# EAGLE board servo_1 (EAGLE 6.5.0)
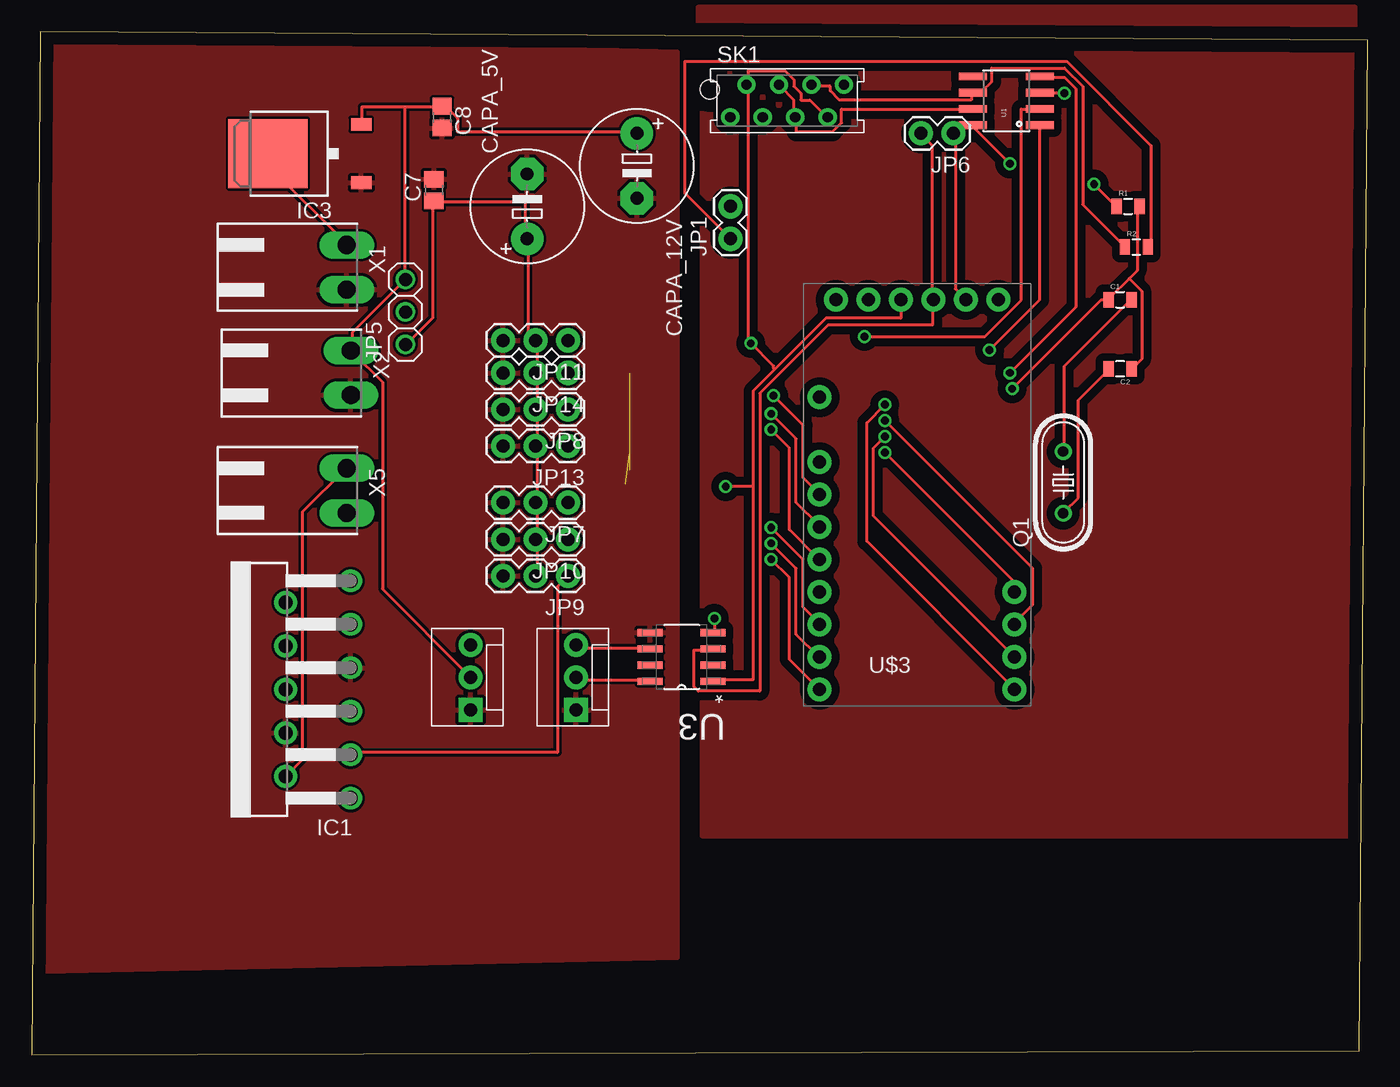
[diagram p0: board, top side]
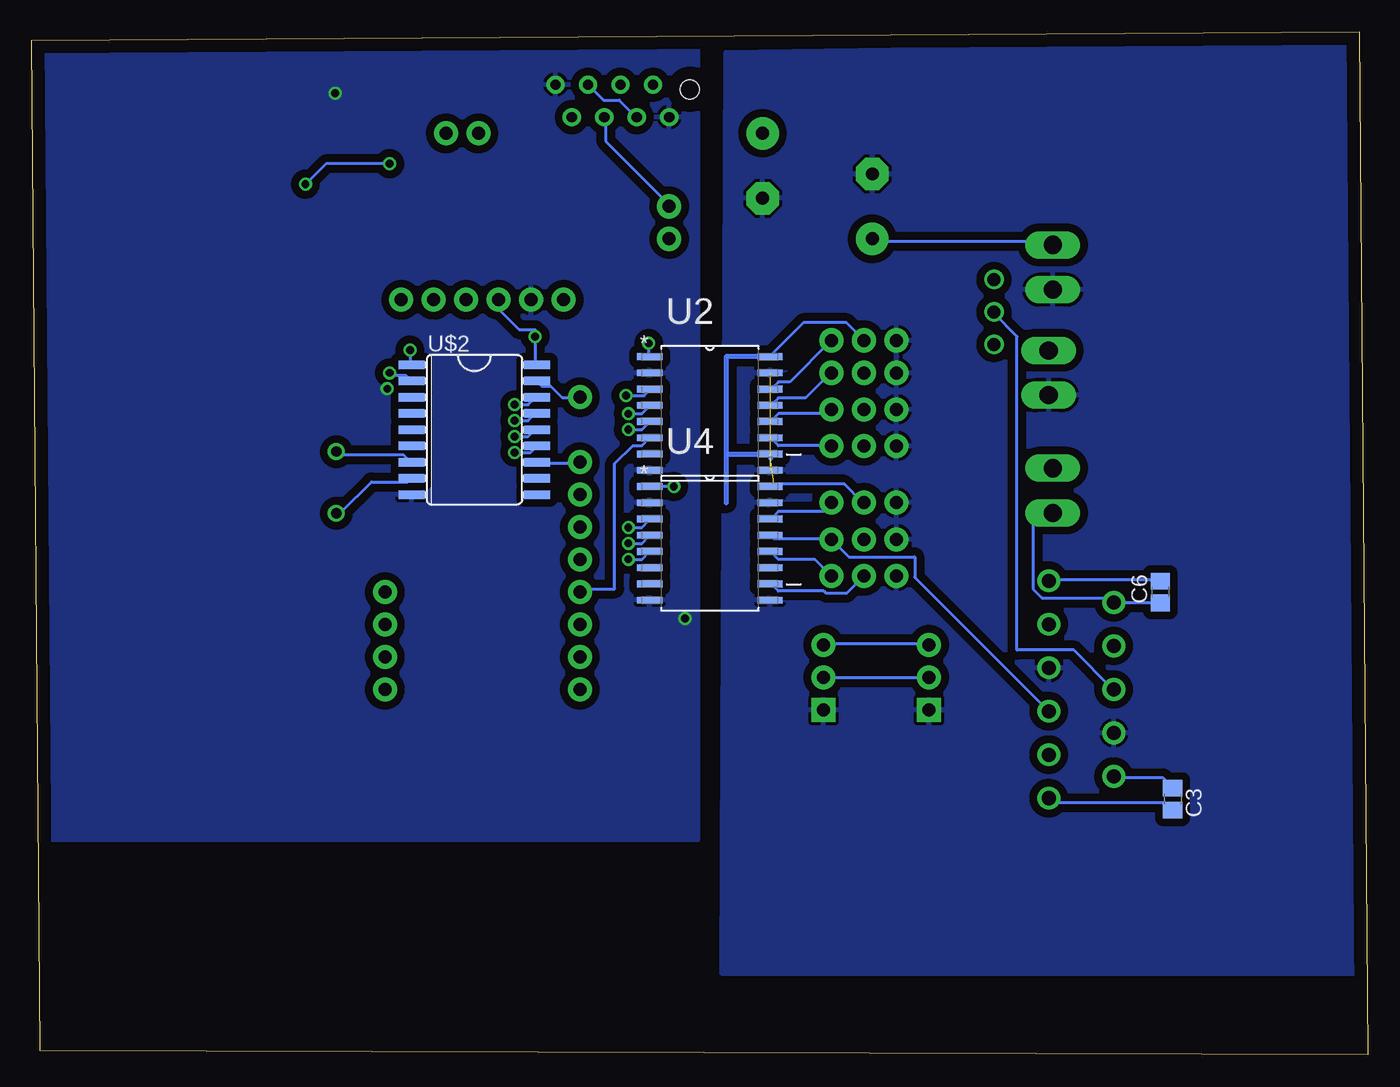
[diagram p1: board, bottom side, seen from below]

Size 104.44 x 80 mm. Coordinates in mm from the lower left corner, seen from the top.
Outline: 0,0 103.81,0.32 104.44,79.36 0.63,80 0,0
Copper layers (1*16): Top 0.035mm / dielectric 1.5mm / Bottom 0.035mm
Design rules "default": minimum track width 10mil, minimum drill 24mil, track to track 8mil, track to pad 8mil, pad to pad 8mil, via to via 8mil, smd to smd 8mil, copper to edge 40mil, drill to drill 8mil, minimum pad ring 10mil, minimum via ring 8mil, stop-mask expansion 4mil, vias tented up to drill 0mil, thermal gap 10mil
Net classes: 0 default: clearance 0.205 mm

## Footprints (pad centres in the part's own frame; a part is rotated, then mirrored left to right if it is on the bottom)
0805 = smd 0.8 x 1.2: 1 -0.9,0; 2 0.9,0
C0805 = smd 1.3 x 1.5: 1 -0.85,0; 2 0.85,0
E5-8,5 = drill 1.016 pad 2.54: + -2.54,0 | drill 1.016 pad 2.54 octagon: - 2.54,0
TO-220-11 = drill 1.1 pad 1.778: 1 -8.5,-9.37; 2 -6.8,-4.29; 3 -5.1,-9.37; 4 -3.4,-4.29; 5 -1.7,-9.37; 6 0,-4.29; 7 1.7,-9.37; 8 3.4,-4.29; 9 5.1,-9.37; 10 6.8,-4.29; 11 8.5,-9.37
DPACK = smd 1 x 1.6: 1 -2.28,-4.8; 3 2.28,-4.8 | smd 5.4 x 6.2: 2 0,2.5
1X02 = drill 1.016 pad 1.88: 1 0,0; 2 2.54,0
MOLEX-1X3 = drill 1.016 pad 1.88 square: 1 0,0 | drill 1.016 pad 1.88: 2 2.54,0; 3 5.08,0
1X03 = drill 1.016: 1 -2.54,0; 2 0,0; 3 2.54,0
1X03' = drill 1.016 pad 1.88: 1 0,0; 2 2.54,0; 3 5.08,0
HC49/S = drill 0.813: 1 -2.413,0; 2 2.413,0
AMP-215079-8 = drill 0.8 pad 1.422: 1 0,-1.27; 2 1.27,1.27; 3 2.54,-1.27; 4 3.81,1.27; 5 5.08,-1.27; 6 6.35,1.27; 7 7.62,-1.27; 8 8.89,1.27 | hole 1.5: -1.62,0.905
SO08 = smd 0.61 x 2.21: 1 -1.905,-2.616; 2 -0.635,-2.616; 3 0.635,-2.616; 4 1.905,-2.616; 5 1.905,2.616; 6 0.635,2.616; 7 -0.635,2.616; 8 -1.905,2.616
SOIC127P1032X265-16N = smd 1.981 x 0.533: 1 -4.699,4.445; 2 -4.699,3.175; 3 -4.699,1.905; 4 -4.699,0.635; 5 -4.699,-0.635; 6 -4.699,-1.905; 7 -4.699,-3.175; 8 -4.699,-4.445; 9 4.699,-4.445; 10 4.699,-3.175; 11 4.699,-1.905; 12 4.699,-0.635; 13 4.699,0.635; 14 4.699,1.905; 15 4.699,3.175; 16 4.699,4.445
SOIC127P600X175-8N = smd 1.981 x 0.559: 1 -2.464,1.905; 2 -2.464,0.635; 3 -2.464,-0.635; 4 -2.464,-1.905; 5 2.464,-1.905; 6 2.464,-0.635; 7 2.464,0.635; 8 2.464,1.905
SO18L = smd 0.66 x 2.032: 1 -5.08,-4.902; 2 -3.81,-4.902; 3 -2.54,-4.902; 4 -1.27,-4.902; 5 0,-4.902; 6 1.27,-4.902; 7 2.54,-4.902; 8 3.81,-4.902; 9 5.08,-4.902; 10 5.08,4.902; 11 3.81,4.902; 12 2.54,4.902; 13 1.27,4.902; 14 0,4.902; 15 -1.27,4.902; 16 -2.54,4.902; 17 -3.81,4.902; 18 -5.08,4.902
ARDUINO_PRO_MINI = drill 1.016 pad 1.88: 3 -7.62,7.62; 5 -7.62,2.54; 6 -7.62,0; 7 -7.62,-2.54; 8 -7.62,-5.08; 9 -7.62,-7.62; 10 -7.62,-10.16; 11 -7.62,-12.7; 12 -7.62,-15.24; 13 7.62,-15.24; 14 7.62,-12.7; 15 7.62,-10.16; 16 7.62,-7.62; BLK -6.35,15.24; GND -3.81,15.24; GRN 6.35,15.24; RXI 1.27,15.24; TXO 3.81,15.24; VCC -1.27,15.24
90-2 = drill 1.422 long: 1 -1.75,5.25; 2 1.75,5.25

## Placement (x,y rotation side)
C1  22pF  [0805]  85.09,59.05 0 top
C2  22pF  [0805]  85.09,53.66 180 top
C3  100nF  [C0805]  15.24,20 270 bottom
C6  100nF  [C0805]  16.19,36.2 90 bottom
C7  100nF  [C0805]  31.43,67.63 90 top
C8  100nF  [C0805]  32.07,73.34 270 top
CAPA_5V  100uF  [E5-8,5]  38.73,66.36 90 top
CAPA_12V  100uF  [E5-8,5]  47.31,69.53 270 top
IC1  LM18200T  [TO-220-11]  15.56,28.57 90 top
IC3  MC33269D-3.3  [DPACK]  20.95,70.48 90 top
JP1  end_lign  [1X02]  54.61,63.82 90 top
JP2  AX-12_1  [MOLEX-1X3]  42.55,26.99 90 top
JP4  AX-12_2  [MOLEX-1X3]  34.29,26.99 90 top
JP5  12V-5V  [1X03]  29.21,58.1 90 top
JP6  RX_TX_Connxion  [1X02]  72.07,72.07 180 top
JP7  PWM7  [1X03']  41.91,43.18 180 top
JP8  PWM5  [1X03']  41.91,50.48 180 top
JP9  servo_option_2  [1X03']  41.91,37.47 180 top
JP10  servo_option_1  [1X03']  41.91,40.32 180 top
JP11  PWM3  [1X03']  41.91,55.88 180 top
JP13  PWM6  [1X03']  41.91,47.62 180 top
JP14  PWM4  [1X03']  41.91,53.34 180 top
Q1  16MHz  [HC49/S]  80.64,44.77 90 top
R1  4,7k  [0805]  85.72,66.36 0 top
R2  120  [0805]  86.36,63.18 0 top
SK1  [AMP-215079-8]  54.61,74.61 0 top
U1  MCP2551  [SO08]  76.2,74.61 90 top
U2  ADUM1400ARWZ  [SOIC127P1032X265-16N]  51.44,50.16 0 bottom
U3  ADUM1250ARZ  [SOIC127P600X175-8N]  50.8,31.11 180 top
U4  ADUM1400ARWZ  [SOIC127P1032X265-16N]  51.44,40.01 0 bottom
U$2  MCP2515SO  [SO18L]  69.85,48.9 270 bottom
U$3  ARDUINO_PRO_MINI'SERVO  [ARDUINO_PRO_MINI]  69.22,43.81 0 top
X1  5V_INPUT  [90-2]  19.37,61.59 270 top
X2  12V_INPUT  [90-2]  19.69,53.34 270 top
X5  MOT_OUTPUT  [90-2]  19.37,44.13 270 top

## Library data of the parts
C1 C2 = SparkFun-Capacitors
C3 C6-C8 CAPA_5V CAPA_12V = resistor
IC1 = national-semiconductor; OC_FARNELL: unknown; OC_NEWARK: unknown
IC3 = linear
JP1 JP6 R1 R2 = SparkFun-Passives
JP2 JP4 JP7-JP11 JP13 JP14 = SparkFun-Connectors
JP5 = adafruit
Q1 = adafruit; OC_FARNELL: 1667008; OC_NEWARK: unknown
SK1 = jt-con-micromatch
U1 = SparkFun-DigitalIC
U2 U4 = Analog Devices_By_element14_Batch_1; MPN: ADUM1400ARWZ; OC_FARNELL: 1226217; OC_NEWARK: 19M8755; PACKAGE: SOIC-16; SUPPLIER: Analog Devices
U3 = Analog Devices_By_element14_Batch_1; MPN: ADUM1250ARZ; OC_FARNELL: 1814353; OC_NEWARK: 27M9880; PACKAGE: SOIC-8; SUPPLIER: Analog Devices
U$2 = MCP2515_MT
U$3 = can_bus_servo
X1 X2 X5 = con-weidmueller-sl35; OC_FARNELL: unknown; OC_NEWARK: unknown

## Nets
5V_DIRTY: C7.1 CAPA_5V.+ IC3.2 JP5.1 JP7.2 JP8.2 JP9.2 JP10.2 JP11.2 JP13.2 JP14.2 U2.10 U2.16 U4.10 U4.16 X1.1
12V_DIRTY: C8.1 CAPA_12V.+ IC3.3 JP2.2 JP4.2 JP5.3 U3.8 X2.1
CAN_CS: U$2.16 U$3.13
CAN_INT: U$2.12 U$3.5
CAN_RXD: U1.4 U$2.2
CAN_TXD: U1.1 U$2.1
CANH: JP1.2 SK1.4 SK1.5 U1.7
CANL: R2.1 SK1.3 SK1.6 U1.6
GND: C1.1 C2.1 R1.2 SK1.1 SK1.8 U1.3 U2.2 U2.8 U3.4 U4.2 U4.8 U$2.9 U$3.GND
GND_DIRTY: C7.2 C8.2 CAPA_5V.- CAPA_12V.- IC1.4 IC1.7 IC3.1 JP2.1 JP4.1 JP7.3 JP8.3 JP9.3 JP10.3 JP11.3 JP13.3 JP14.3 U2.9 U2.15 U3.5 U4.9 U4.15 X1.2 X2.2
MISO: U$2.15 U$3.15
MOSI: U$2.14 U$3.14
N$1: C3.2 IC1.1
N$2: C1.2 Q1.2 U$2.7
N$3: C2.2 Q1.1 U$2.8
N$4: C6.2 IC1.11
N$5: R1.1 U1.8
N$7: JP1.1 R2.2
N$9: C3.1 IC1.2 X5.1
N$10: C6.1 IC1.10 X5.2
PWM3: U2.3 U$3.6
PWM3_OUT: JP11.1 U2.14
PWM4: U2.4 U$3.7
PWM4_OUT: JP14.1 U2.13
PWM5: U2.5 U$3.8
PWM5_OUT: JP8.1 U2.12
PWM6: U2.6 U$3.9
PWM6_OUT: JP13.1 U2.11
PWM7: U4.3 U$3.10
PWM7_OUT: JP7.1 U4.14
PWM8: U4.4 U$3.11
PWM8_OUT: IC1.5 JP10.1 U4.13
PWM9: U4.5 U$3.12
PWM9_OUT: IC1.3 JP9.1 U4.12
RST: U$2.17 U$3.3
RXI: JP6.2 U3.3 U$3.RXI
RXTX_OUT: JP2.3 JP4.3 U3.6
SCK: U$2.13 U$3.16
TXO: JP6.1 U$3.TXO
VCC: SK1.2 SK1.7 U1.2 U2.1 U3.1 U4.1 U$2.18 U$3.VCC
VINPUT: IC1.6 JP5.2

## Tracks (layer width: path | path; a pad name or v marks a point on that pad's centre or on a via)
5V_DIRTY  (1 unrouted)
  Top 0.254: JP9.2 39.5,37.52 39.5,40.18 JP10.2 39.5,40.36 39.5,43.03 JP7.2 39.5,43.2 39.5,47.47 JP13.2 39.5,47.65 39.5,50.32 JP8.2 39.5,50.49 39.5,53.34 | 39.5,53.34 39.5,55.83 JP11.2 39.32,56.01 38.79,56.54 38.79,63.65 CAPA_5V.+ 38.61,63.83 38.61,66.67 31.5,66.67 C7.1 31.32,66.67 31.32,57.61 29.36,55.65 JP5.1 | 39.5,53.34 JP14.2 | X1.1 24.56,63.48 18.52,69.52 18.52,70.41 IC3.2
  Bottom 0.254: JP9.2 40.74,36.09 42.34,36.09 42.52,36.27 46.08,36.27 46.61,36.8 U4.10 | U4.16 46.61,44.45 46.43,44.63 40.92,44.63 39.5,43.2 JP7.2 | JP11.2 40.74,57.25 44.12,57.25 46.61,54.76 U2.16 | X1.1 24.74,63.48 24.92,63.65 38.61,63.65 CAPA_5V.+
12V_DIRTY
  Top 0.254: U3.8 48.21,29.34 42.7,29.34 42.7,29.52 JP2.2 | 29.18,74.14 25.81,74.14 25.81,72.9 IC3.3 | 29.18,74.14 32.03,74.14 C8.1 32.21,74.32 33.27,73.25 33.27,72.19 47.14,72.19 CAPA_12V.+ | 29.18,74.14 29.18,60.81 JP5.3 29.18,60.63 25.09,56.54 25.09,55.12 X2.1 25.09,54.94 27.41,52.63 27.41,36.45 34.16,29.69 JP4.2
  Bottom 0.254: JP4.2 34.34,29.52 42.52,29.52 JP2.2
CAN_CS  (via drill 0.61)
  Top 0.254: v66.7,50.85 65.28,49.43 65.28,40.18 76.83,28.63 U$3.13
  Bottom 0.254: v66.7,50.85 65.63,50.85 65.1,51.38 U$2.16
CAN_INT
  Bottom 0.254: U$2.12 64.92,46.23 61.72,46.23 U$3.5
CAN_RXD  (via drill 0.61)
  Top 0.254: v76.48,53.34 81.64,58.5 81.64,75.56 80.75,76.45 78.97,76.45 U1.4
  Bottom 0.254: v76.48,53.34 76.3,53.16 75.23,53.16 74.88,52.81 U$2.2
CAN_TXD  (via drill 0.61)
  Top 0.254: v74.88,55.12 78.79,59.03 78.79,72.54 U1.1
  Bottom 0.254: v74.88,55.12 74.88,54.05 U$2.1
CANH
  Top 0.254: U1.7 73.46,73.97 63.32,73.97 63.32,72.9 62.61,72.19 59.77,72.19 59.77,73.25 SK1.5 59.59,73.43 59.59,74.68 58.52,75.74 SK1.4
  Bottom 0.254: JP1.2 54.61,66.5 59.59,71.48 59.59,73.25 SK1.5
CANL
  Top 0.254: R2.1 85.37,63.3 82.17,66.5 82.17,75.74 80.75,77.17 75.06,77.17 75.06,76.1 74.35,75.39 73.64,75.39 U1.6 73.46,75.21 73.46,74.68 63.14,74.68 62.43,75.39 62.43,75.74 61.01,75.74 SK1.6
  Bottom 0.254: SK1.3 57.28,73.43 58.52,74.68 59.77,74.68 60.83,75.74 SK1.6
GND  (via drill 0.61)
  Top 0.254: v53.36,34.14 53.36,33.07 U3.4 | 85.81,60.72 86.44,61.34 86.44,66.14 86.61,66.32 R1.2 | 85.81,60.72 84.3,59.21 C1.1 84.12,59.03 83.59,59.03 v76.66,52.09 | 85.81,60.72 86.79,59.74 86.79,54.41 86.08,53.7 C2.1 | v80.75,75.21 78.97,75.21 U1.3
  pour Bottom (isolate 0.61): 52.39,78.42 52.39,16.83 103.82,16.83 103.82,17.14 103.5,17.14 103.5,81.92 52.07,81.92 52.07,78.74 52.39,78.74
GND_DIRTY  (1 unrouted)
  pour Bottom (isolate 0.61): -24.76,80.33 -22.54,6.35 50.48,6.35 50.17,78.42 8.89,79.06
  pour Top: -22.22,6.03 50.48,7.62 50.48,78.42 -24.45,80.33
MISO  (via drill 0.61)
  Top 0.254: v66.7,49.61 78.26,38.05 78.26,35.2 76.83,33.78 U$3.15
  Bottom 0.254: v66.7,49.61 65.63,49.61 65.1,50.14 U$2.15
MOSI  (via drill 0.61)
  Top 0.254: v66.7,48.36 65.81,47.47 65.81,42.14 U$3.14
  Bottom 0.254: v66.7,48.36 65.63,48.36 65.1,48.9 U$2.14
N$1
  Bottom 0.254: C3.2 15.32,19.2 15.85,19.74 24.74,19.74 24.92,19.91 IC1.1
N$2
  Top 0.254: C1.2 85.9,59.03 80.75,53.87 80.75,47.3 Q1.2
  Bottom 0.254: U$2.7 74.88,46.41 75.41,46.94 80.39,46.94 80.57,47.12 Q1.2
N$3
  Top 0.254: C2.2 84.12,53.52 81.81,51.21 81.81,43.56 80.75,42.49 Q1.1
  Bottom 0.254: U$2.8 74.88,44.98 75.06,44.81 77.9,44.81 80.21,42.49 80.57,42.49 Q1.1
N$4
  Bottom 0.254: C6.2 16.2,37.16 24.92,37.16 IC1.11
N$5  (via drill 0.61)
  Top 0.254: v83.06,68.1 84.66,66.5 R1.1 | v76.48,69.7 73.64,72.54 U1.8
  Bottom 0.254: v83.06,68.1 81.46,69.7 v76.48,69.7
N$6
  Bottom 0.406: 47.62,54.61 50.17,54.61 50.17,46.99 | 50.17,46.99 46.67,46.99 46.67,46.67 | 50.17,46.99 50.17,43.18
N$7
  Top 0.254: R2.2 87.33,63.3 87.5,63.48 87.5,71.12 80.92,77.7 51.05,77.7 51.05,67.39 JP1.1
N$8
  pour Top (isolate 0.61): 52.39,78.74 52.39,17.14 103.5,17.14 103.5,81.92 52.07,81.92 52.07,78.74
N$9
  Top 0.254: X5.1 24.56,45.87 21.18,42.49 21.18,23.11 19.94,21.87 IC1.2
  Bottom 0.254: C3.1 15.32,20.98 16.03,21.69 19.76,21.69 IC1.2
N$10
  Bottom 0.254: C6.1 16.2,35.38 19.76,35.38 IC1.10 19.94,35.38 20.3,35.74 25.45,35.74 26.16,36.45 26.16,42.32 24.74,42.32 X5.2
PWM3  (via drill 0.61)
  Top 0.254: v57.99,51.56 60.3,49.25 60.3,45.16 61.54,43.92 U$3.6
  Bottom 0.254: v57.99,51.56 56.57,51.56 56.21,51.92 U2.3
PWM3_OUT
  Bottom 0.254: U2.14 46.61,52.09 46.08,52.63 45.19,52.63 41.99,55.83 JP11.1
PWM4  (via drill 0.61)
  Top 0.254: v57.81,50.14 59.77,48.18 59.77,43.2 61.54,41.43 U$3.7
  Bottom 0.254: v57.81,50.14 56.74,50.14 56.21,50.67 U2.4
PWM4_OUT
  Bottom 0.254: U2.13 46.61,50.85 46.08,51.38 43.94,51.38 41.99,53.34 JP14.1
PWM5  (via drill 0.61)
  Top 0.254: v57.81,48.9 59.23,47.47 59.23,41.07 61.54,38.76 U$3.8
  Bottom 0.254: v57.81,48.9 56.74,48.9 56.21,49.43 U2.5
PWM5_OUT
  Bottom 0.254: U2.12 46.61,49.61 46.08,50.14 42.16,50.14 41.99,50.32 JP8.1
PWM6
  Bottom 0.254: U2.6 56.74,47.65 57.45,47.65 58.88,46.23 58.88,36.45 61.37,36.45 61.54,36.27 U$3.9
PWM6_OUT
  Bottom 0.254: U2.11 46.61,48.18 46.08,47.65 41.99,47.65 JP13.1
PWM7  (via drill 0.61)
  Top 0.254: v57.81,41.25 60.3,38.76 60.3,35.03 61.54,33.78 U$3.10
  Bottom 0.254: v57.81,41.25 56.74,41.25 56.21,41.78 U4.3
PWM7_OUT
  Bottom 0.254: U4.14 46.61,41.96 46.08,42.49 42.52,42.49 41.99,43.03 JP7.1
PWM8  (via drill 0.61)
  Top 0.254: v57.81,40.01 59.77,38.05 59.77,32.89 61.54,31.11 U$3.11
  Bottom 0.254: v57.81,40.01 56.74,40.01 56.21,40.54 U4.4
PWM8_OUT
  Bottom 0.254: U4.13 46.61,40.54 46.43,40.36 41.99,40.36 JP10.1 41.81,40.18 40.56,38.94 35.41,38.94 35.41,37.34 25.09,27.03 IC1.5
PWM9  (via drill 0.61)
  Top 0.254: v57.81,38.76 59.23,37.34 59.23,30.94 U$3.12
  Bottom 0.254: U4.5 56.74,38.76 v57.81,38.76
PWM9_OUT
  Top 0.254: IC1.3 25.09,23.65 41.1,23.65 41.1,36.63 41.81,37.34 JP9.1
  Bottom 0.254: U4.12 46.61,39.29 46.08,38.76 43.23,38.76 41.99,37.52 JP9.1
RST
  Bottom 0.254: U$2.17 64.92,52.63 64.57,52.27 63.86,52.27 62.97,51.38 61.72,51.38 U$3.3
RXI
  Top 0.254: U3.3 53.19,31.65 51.77,31.65 51.77,28.8 52.12,28.45 56.92,28.45 56.92,51.74 62.25,57.07 70.43,57.07 70.43,59.03 U$3.RXI 70.43,59.21 70.43,71.12 69.55,72.01 JP6.2
RXTX_OUT
  Top 0.254: U3.6 48.21,31.83 42.7,31.83 42.7,32 JP2.3
  Bottom 0.254: JP4.3 34.34,32.18 42.52,32.18 JP2.3
SCK  (via drill 0.61)
  Top 0.254: v66.7,47.12 76.83,36.98 U$3.16
  Bottom 0.254: U$2.13 65.46,47.12 v66.7,47.12
TXO
  Top 0.254: U$3.TXO 72.92,59.21 72.21,59.92 72.21,72.01 JP6.1
VCC  (via drill 0.61)
  Top 0.254: SK1.7 62.08,73.43 60.83,74.68 60.12,74.68 60.12,75.21 59.59,75.74 59.59,76.28 58.88,76.99 56.03,76.99 56.03,75.92 SK1.2 56.03,75.74 56.03,55.83 v56.21,55.65 57.99,53.87 57.99,53.7 58.08,53.61 | 56.39,44.45 56.39,51.92 58.08,53.61 | 56.39,44.45 56.39,29.34 53.36,29.34 U3.1 | 58.08,53.61 62.08,57.61 67.94,57.61 U$3.VCC | 56.39,44.45 v54.25,44.45 | v65.1,56.19 74.52,56.19 77.37,59.03 77.37,73.97 78.79,73.97 U1.2
  Bottom 0.254: v54.25,44.45 U4.1 | v56.21,55.65 56.21,54.76 U2.1 | U$3.VCC 67.94,58.32 66.34,56.72 65.1,56.72 v65.1,56.19 65.1,54.05 U$2.18
VINPUT
  Bottom 0.254: JP5.2 29.18,57.96 27.41,56.19 27.41,31.65 22.96,31.65 19.94,28.63 IC1.6